# Altium PCB SmartGarden.PcbDoc
Units mil, origin at the board's own origin, x right, y up, seen from the top; angles counter-clockwise.
Board outline 10512 x 650 mil, 2 copper layers (Top Layer, Bottom Layer); 29 components, 29 nets, 221 pads, 24 vias.
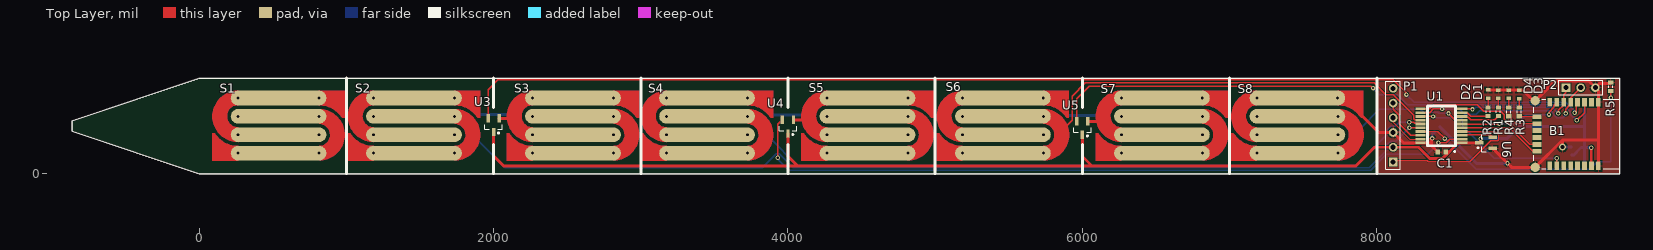
[diagram p0: Top Layer view]
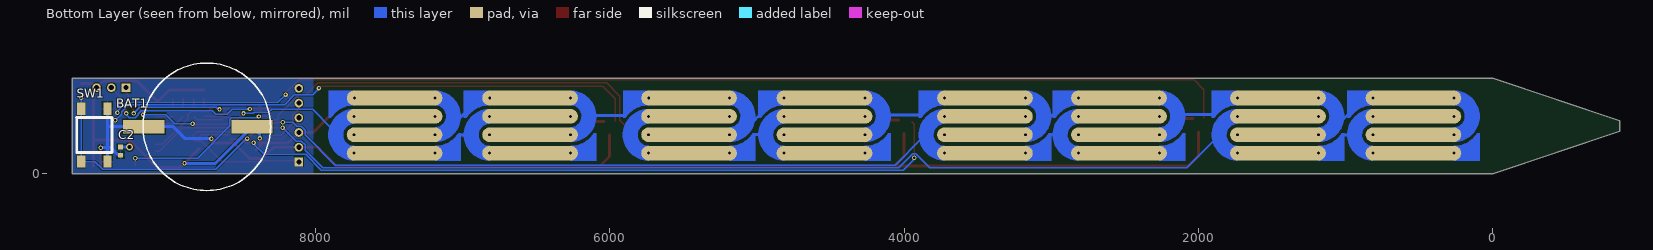
[diagram p1: Bottom Layer view, seen from below]

## Layer stack, top to bottom
Top Solder: solder mask 0.4, Solder Resist, Dk 3.5
Top Layer: signal copper 1.4
Dielectric 1: dielectric 12.6, FR-4, Dk 4.8
Bottom Layer: signal copper 1.4
Bottom Solder: solder mask 0.4, Solder Resist, Dk 3.5

## Board outline
9650,0 0,0 -862,290 -862,360 0,650 9650,650

## Design rules (kind name [scope] priority, off if disabled: settings)
Clearance [All] p1: gap=7
HoleSize [All] p1: absolutevalues=TRUE maxlimit=100 minlimit=10 maxpercent=80.000 minpercent=20.000
MinimumSolderMaskSliver [All] p1: minsoldermaskwidth=7
PolygonConnect [All] p1: connectstyle=Relief reliefconductorwidth=10 reliefentries=4 polygonreliefangle="90 Angle" airgapwidth=10
RoutingVias [All] p1: holewidth=15 width=30 viastyle="Through Hole" minholewidth=10 minwidth=25 maxholewidth=28 maxwidth=50
SilkToSilkClearance [All] p1 off: silktosilkclearance=10
SilkToSolderMaskClearance [IsPad] p1 off: minsilkscreentomaskgap=10 clearancetoexposedcopper=TRUE
SolderMaskExpansion [All] p1: expansion=4
Width Width_VCC [InNet('VCC')] p1: maxlimit=20 minlimit=8 preferedwidth=20
Width Width_GND [InNet('GND')] p2: maxlimit=20 minlimit=8 preferedwidth=20 minimp=50.000000 maximp=50.000000 favimp=50.000000
Width [All] p3: maxlimit=20 minlimit=8 preferedwidth=20 minimp=50.000000 maximp=50.000000 favimp=50.000000
26 further rules are at their usual default settings.

## Components (designator, comment, footprint, x,y, rotation, side; value= is the part's Value field where it differs from the comment)
B1 "RN4020" "RN4020 MODULE-24" 9290,270 r270 top
BAT1 "2032 Coin Cell" 1063TR-COINCELL 8770,320 r270 bottom
C1 "Cap Semi" 1608[0603] 8441,148 r0 top
C2 "Cap Semi" 1608[0603] 9322,154 r270 bottom
D1 "LED" 603_ 8825,540 r0 top
D2 "LED" 603_ 8756,541 r0 top
D3 "LED" 603_ 8966,539 r0 top
D4 "LED" 603_ 8895,540 r0 top
P1 "Header 6" HDR1X6 8110,80 r90 top
P2 "Serial" HDR1X3 9284,585 r0 top
R1 "Res3" J1-0603 8825,421 r90 top
R2 "Res3" J1-0603 8755,421 r90 top
R3 "Res3" J1-0603 8967,420 r90 top
R4 "Res3" J1-0603 8895,420 r90 top
R5 "Res3" J1-0603 9588,591 r270 top
S1 "MoistureSensor" MOISTURE_2 90,90 r0 top
S2 "MoistureSensor" MOISTURE_2 1010,90 r0 top
S3 "MoistureSensor" MOISTURE_2 2090,90 r0 top
S4 "MoistureSensor" MOISTURE_2 3000.19,90 r0 top
S5 "MoistureSensor" MOISTURE_2 4090,90 r0 top
S6 "MoistureSensor" MOISTURE_2 5010,90 r0 top
S7 "MoistureSensor" MOISTURE_2 6090,90 r0 top
S8 "MoistureSensor" MOISTURE_2 7010,90 r0 top
SW1 "PUSHBUTTON" PUSHBUTTON 9411,83 r0 bottom
U1 "PIC16LF1559" SSOP-20 8580,210 r180 top
U3 "MCP9700" SOT23_M 2000,330 r270 top
U4 "MCP9700" SOT23_M 4000,320 r270 top
U5 "MCP9700" SOT23_M 6000,310 r270 top
U6 "MCP9700" SOT23_M 8740,210 r180 top

## Footprints (in the part's own frame and the unit in brackets; to place one, negate y for a bottom-side part, rotate by r counter-clockwise, add the part's x,y. Pads: shape width x height; smd on the part's side, far side on the other; paste and mask are expansions set on the pad)
603_ [mm]
  rect 0.8x0.6 smd: 1(0,-0.725) 2(0,0.725)
1063TR-COINCELL [mm]
  rect 2.36x7.1 smd: 1(0,-10) 2(0,8.7)
  silkscreen extent -10.97,-10.12 11.02,11.87
1608[0603] [mm] "Chip Capacitor, Body 1.6x0.8mm, IPC High Density"
  rect 0.8x0.9 smd: 1(-0.7,0) 2(0.7,0)
  body extent -0.87,-0.48 0.87,0.48, height 1.3
HDR1X3 [mm] "Connector; Header; 3 Position"
  rect 1.5x1.5 hole 0.9: 1(0,0)
  round 1.5 hole 0.9: 2(2.54,0) 3(5.08,0)
  silkscreen extent -1.27,-1.27 6.35,1.27
HDR1X6 [mm] "Connector; Header; 6 Position"
  rect 1.5x1.5 hole 0.9: 1(0,0)
  round 1.5 hole 0.9: 2(2.54,0) 3(5.08,0) 4(7.62,0) 5(10.16,0) 6(12.7,0)
  silkscreen extent -1.27,-1.27 13.97,1.27
J1-0603 [mm] "Chip Resistor, Body 1.6x0.8mm, IPC High Density"
  rect 0.7x0.9 smd: 1(-0.75,0) 2(0.75,0)
  silkscreen extent -0.2,-0.35 0.2,0.35, body extent -0.85,-0.48 0.85,0.48, height 0.9
MOISTURE_2 [mil]
  round 30 hole 20: 0(175,175.13) 0(175.01,425.36) 0(723.64,424.77) 0(725,175) 1(175,300) 1(175,49.88) 1(725,49.64) 1(725,299.87)
  oval 650x100 smd paste-1000: 0(449.93,424.51) 0(450,175) 1(450,50) 1(450,300)
  oval 650x100 smd far side paste-1000: 0(449.93,424.51) 0(450,175) 1(450,50) 1(450,300)
  Top Layer region: 723.64,374.66 809.98,354.39 876.55,295.78 876.56,295.78 882.97,290.02 898.64,290.02 898.64,299.66 898.64,474.66 723.64,474.66
  Top Layer region: 175,125.25 87.95,149.33 24.08,213.2 0,300.25 0,300.25 24.08,387.3 87.95,451.17 175,475.25 175,475.25 175,375.25 146.05,369.98 121.49,353.76 105.27,329.21 100,300.25 100,300.25 110.54,263.1 137.85,235.79 175,225.25 175,225.25
  Top Layer region: 725,349.75 812.05,325.67 875.92,261.8 900,174.75 900,174.75 875.92,87.7 812.05,23.83 725,-0.25 725,-0.25 725,99.75 753.95,105.02 778.51,121.24 794.73,145.79 800,174.75 800,174.75 789.46,211.9 762.15,239.21 725,249.75 725,249.75
  Top Layer region: 175,100 91.86,118.66 26.27,173.04 26.27,173.04 15.67,184.64 0,184.64 0,175 0,0 175,0
  Bottom Layer region: 723.64,374.66 809.98,354.39 876.56,295.78 876.56,295.78 882.97,290.02 898.64,290.02 898.64,299.66 898.64,474.66 723.64,474.66
  Bottom Layer region: 175,125.25 87.95,149.33 24.08,213.2 0,300.25 0,300.25 24.08,387.3 87.95,451.17 175,475.25 175,475.25 175,375.25 146.05,369.98 121.49,353.76 105.27,329.21 100,300.25 100,300.25 110.54,263.1 137.85,235.79 175,225.25 175,225.25
  Bottom Layer region: 725,349.75 812.05,325.67 875.92,261.8 900,174.75 900,174.75 875.92,87.7 812.05,23.83 725,-0.25 725,-0.25 725,99.75 753.95,105.02 778.51,121.24 794.73,145.79 800,174.75 800,174.75 789.46,211.9 762.15,239.21 725,249.75 725,249.75
  Bottom Layer region: 175,100 91.86,118.66 26.27,173.04 26.27,173.04 15.67,184.64 0,184.64 0,175 0,0 175,0
PUSHBUTTON [mm] "TE 5-1437565-0"
  rect 1.4x2.1 smd: 1(4.5,-9.1) 1(4.5,0) 2(0,-9.1) 2(0,0)
  silkscreen extent -0.8,-7.57 5.3,-1.55
"RN4020 MODULE-24" [mm]
  rect 1.5x0.8 smd: 1(-5.5,5.45) 2(-5.5,4.25) 3(-5.5,3.05) 4(-5.5,1.85) 5(-5.5,0.65) 6(-5.5,-0.55) 7(-5.5,-1.75) 8(-5.5,-2.95) 17(5.5,-2.95) 18(5.5,-1.75) 19(5.5,-0.55) 20(5.5,0.65) 21(5.5,1.85) 22(5.5,3.05) 23(5.5,4.25) 24(5.5,5.45)
  round 1.6 smd: 9(-5.75,-5.45) 16(5.75,-5.45)
  rect 0.8x1.5 smd: 10(-3,-5.15) 11(-1.8,-5.15) 12(-0.6,-5.15) 13(0.6,-5.15) 14(1.8,-5.15) 15(3,-5.15)
  silkscreen extent -6,-5.75 6,9.1, body extent -5.75,-5.45 5.75,14.05, height 2.3
SOT23_M [mm] "SOT23, 3-Leads, Body 2.9x1.3mm, Pitch 0.95mm, Lead Span 2.3mm - Reverse Pinning, IPC Low Density"
  rect 1.45x0.6 smd: 1(1.175,0) 2(-1.175,-0.95) 3(-1.175,0.95)
  silkscreen extent -0.1,-1.5 1.47,1.5, body extent -0.7,-1.5 0.7,1.5, height 1.1
SSOP-20 [mm]
  rect 1.75x0.45 smd: 1(0,0) 2(0,-0.65) 3(0,-1.3) 4(0,-1.95) 5(0,-2.6) 6(0,-3.25) 7(0,-3.9) 8(0,-4.55) 9(0,-5.2) 10(0,-5.85) 11(7.2,-5.85) 12(7.2,-5.2) 13(7.2,-4.55) 14(7.2,-3.9) 15(7.2,-3.25) 16(7.2,-2.6) 17(7.2,-1.95) 18(7.2,-1.3) 19(7.2,-0.65) 20(7.2,0)
  silkscreen extent 1.2,-6.35 5.98,1.63

## Part data
C1 C2: "Capacitor (Semiconductor SIM Model)"
P1: "Header, 6-Pin"
P2: library part "Header 3", "Header, 3-Pin"
R1 R2 R3 R4 R5: "Resistor"
SW1: "TE 5-1437565-0"

## Via types
v1: diameter 30, hole 15, Top Layer to Bottom Layer, 23 vias
v2: diameter 50, hole 28, Top Layer to Bottom Layer, 1 vias

## Nets (pads, with @x,y where several pads share a name; then routed paths per layer and width w, separated by ;. In a path a pad name is that pad's centre, name@x,y a point inside that pad or via, vN(x,y) a via of type N, cw(c..) or ccw(c..) an arc to the next point about the centre after c; other vN are vias at no path point)
CONNECT: B1.10 R3.1 | length 121.2
  Top Layer w10: R3.1 8969.36,388.11 B1.10
CTS: B1.14 U1.11 | length 929.9
  Top Layer w10: U1.11 8360.27,440.31 8387.96,468 8682,468 8725.25,424.75 8840.19,424.75 8865.28,399.66 8865.28,371.72 9037.87,199.13 B1.14
GND: B1.1 B1.9 B1.16 B1.24 BAT1.2 C1.1 C2.1 D1.2 D2.2 D3.2 D4.2 P1.3 P2.3 R5.1 S1.0 S2.0 S3.0 S4.0 S5.0 S6.0 S7.0 S8.0 U1.20 U3.3 U4.3 U5.3 U6.3 | length 4988.9
  Top Layer w20: U3.3 2123.26,376.26 ; U4.3 4105.26,366.26 ; U5.3 6113.74,356.26 ; 7872,421 8013,280 P1.3 8180,210 ; 8180,209 8370,209 ; v1@8367,239 8367,219 8370,222 8370,190.44 C1.1@8400.44,160 ; v1@8376,238 v1(8376,240) ; D2.2 8990.46,569.54 9063.62,496.38 B1.9 9210.58,631.53 9437.47,631.53 P2.3 ; U6.3 v1@8887.43,71.43 ; v1(8887,71) v1@8887.43,71.43 ; v2(9260.44,181.56) 9260.44,228.63 ; B1.24 9506,54.9 9506,563 P2.3 ; 9506,230 9261.81,230 9260.44,228.63 ; R5.1@9589,614.53 9513.53,614.53 P2.3 ; v1@8887.43,71.43 8915.23,43.62 B1.16 9260.44,228.63
  Bottom Layer w20: 978,410 1048,340 1048,337 ; 1898,402 2111,402 ; 2979,395 3033,395 ; 3885,400 4116,400 4117,401 ; 4974,405 5037,342 5038,342 ; 5900,396 6111,396 ; 6972,424 7028,368 7052,368 ; v1(8376,240) 8376,268.52 BAT1.2@8393,285.52 ; BAT1.2 8676.48,71 v1(8887,71) ; v2(9260.44,181.56) C2.1
LED1: R1.1 U1.8 | length 268.2
  Top Layer w10: U1.8 8580,384.4 8619.42,384.4 8638.13,365.69 8799.22,365.69 R1.1
LED2: R2.1 U1.9 | length 184.6
  Top Layer w10: U1.9 8614.68,414.72 8637.94,391.47 R2.1
M1: S1.1 S2.1 U1.16 | length 6748.6
  Top Layer w10: v1(8220.36,312.36) U1.16
  Bottom Layer w10: 1894,226 2080,40 3823.82,40 3919.82,136 3942.18,136 4037.18,41 7949,41 8068.47,160.47 8068.47,197.2 8092.8,221.53 8129.53,221.53 v1(8220.36,312.36)
  Bottom Layer w20: 966,263 1022,263
M2: S3.1 S4.1 U1.15 | length 4671.6
  Top Layer w10: v1(8219,350) 8249.8,350 8257.12,342.68 8291.8,342.68 U1.15
  Bottom Layer w10: 3878,240 4059,59 7862,59 8068.47,265.47 8068.47,297.2 8092.8,321.53 8124.53,321.53 8153,350 v1(8219,350)
  Bottom Layer w20: 2976,265 3010,265
M3: S5.1 S6.1 U1.14 | length 2776.6
  Top Layer w10: 5896.88,330.55 5931,364.67 5931,528 6020,617 7981,617 8061,537 8111.73,537 8250.09,398.64 8250.09,375.3 8257.12,368.27 8291.8,368.27 U1.14
  Bottom Layer w20: 4975,267 5019,267
M4: S7.1 S8.1 U1.7 | length 901.9
  Top Layer w10: v1(8486,410) 8532.46,363.54 U1.7
  Bottom Layer w10: 7889,236 7889,310 8017,438 8295.27,438 8317.13,416.13 8413.87,416.13 8420,410 v1(8486,410)
  Bottom Layer w20: 6967,264 7020,264
MLDP: B1.8
MLDP_EV: B1.11 R4.1 | length 212.8
  Top Layer w10: R4.1 8944.61,340.87 B1.11
NetD1_1: D1.1 R1.2 | length 60.9
  Top Layer w10: R1.2 D1.1
NetD2_1: D2.1 R2.2 | length 60.9
  Top Layer w10: R2.2 D2.1@8755,511.46
NetD3_1: D3.1 R3.2 | length 59.9
  Top Layer w10: R3.2 D3.1@8967,509.46
NetD4_1: D4.1 R4.2 | length 61.9
  Top Layer w10: R4.2 D4.1
NetP1_1: P1.1 U1.4 | length 1074.7
  Top Layer w10: P1.1 8120,90 8341.89,90 8348.89,83 8631.1,83 8771.69,223.59 8819.77,223.59 8826.8,230.62 8826.8,264.18 8804.21,286.77 U1.4
NetP1_4: P1.4 U1.19 | length 264.5
  Top Layer w8: P1.4 8110,349 8223.41,235.59 U1.19
NetP1_5: P1.5 U1.18 | length 335.8
  Top Layer w10: P1.5 8110,438.73 8151.53,397.2 8151.53,338.47 8228.82,261.18 U1.18
NetR5_2: R5.2 SW1.1 U1.17 | length 1876.1
  Top Layer w10: U1.17 8414.23,286.77 8461,240 v1(8461,239) ; v1(9589,516) R5.2@9589,555.47
  Bottom Layer w10: v1(8461,239) 8461,244 8675.34,29.66 9443.53,29.66 9496.87,83 9588.17,83 SW1.1@9588.17,417.84 ; SW1.1@9589,442.1 v1(9589,516)
RTS: B1.18 U1.13 | length 1121.8
  Top Layer w10: U1.13 v1(8381.87,389.13) ; B1.18 v1(9221.1,105.9)
  Bottom Layer w10: v1(8381.87,389.13) 8390,381 8569.67,381 8579.25,371.43 8579.25,324.57 8797.92,105.9 v1(9221.1,105.9)
RX: B1.6 P2.1 U1.10 | length 856.2
  Top Layer w10: U1.10 8645.69,440.31 v1(8649,437) ; v1(9232,410) 9232,430 B1.6@9268.35,466.35 ; B1.6@9268,476.88 9266,478.88 9271,483.88 B1.6 9268.35,535.35 9284,551 P2.1
  Bottom Layer w10: v1@8659,437 8673,451 9191,451 v1(9232,410)
TEMP1: B1.4 U3.2 | length 7786.1
  Top Layer w10: U3.2 1962.6,569.6 2030,637 8111.73,637 8200,548.73 v1(8200,538) ; v1(9343,415) 9354,426 9354,477.7 B1.4
  Bottom Layer w10: v1(8200,538) 8253,485 9284,485 9343,426 v1(9343,415)
TEMP2: U1.2 U4.2 | length 5036.8
  Top Layer w10: v1(3931,109) 3931,334.66 3949,352.66 ; v1(8418,211) 8471.18,211 8495.77,235.59 U1.2
  Bottom Layer w10: v1(3931,109) 3931,99 4006,24 7957,24 8065,132 8347,132 8422,207 v1(8418,211)
TEMP3: B1.3 U5.2 | length 3843.8
  Top Layer w10: U5.2 5962.6,509.6 6046,593 7958,593 7969,582 v1(7974,582) ; v1@9358,373 v1(9358,364) 9410.08,416.08 B1.3
  Bottom Layer w10: v1(7974,582) 7974,577 8016,535 8140,535 8207,468 9268.18,468 9314,422.18 9314,405.82 9355.82,364 v1(9358,364)
TEMP4: U1.3 U6.2 | length 215.1
  Top Layer w10: U1.3 8583.82,265 8768.66,265 U6.2
TX: B1.5 P2.2 U1.12 | length 1286.9
  Top Layer w10: U1.12 8358.72,414.72 8384,440 v1(8443,440) ; v1(9283,410) 9283,438.94 9296.1,452.04 9296.1,455.04 9320,478.94 9314,484.94 B1.5 9315.59,516.59 P2.2
  Bottom Layer w10: v1(8443,440) 8446,437 8564,437 8597,404 8674,404 8699,429 9181,429 9201,409 9201,399.82 9220.82,380 9262,380 v1@9289,407
VCC: B1.23 BAT1.1 C1.2 C2.2 P1.2 SW1.2 U1.1 U3.1 U4.1 U5.1 U6.1 | length 8899.1
  Top Layer w20: U3.1 2000,122 2069,53 4066,53 ; U4.1 4000,119 4066,53 ; U5.1 6000,118 6065,53 ; 8635.73,208.73 8550.73,208.73 8447,105 8358,105 8283,180 P1.2 7984,180 7857,53 6065,53 ; 8644,210 U6.1 8704,220.26 v1(8704,238) ; B1.23@9456,54.79 9459,57.79 9456,60.79 v1(9456,177) ; 4066,53 6065,53
  Bottom Layer w20: v1(8704,238) 8882,238 8964,320 BAT1.1 9409,320 9410,319 ; C2.2 9335.44,126.44 9387,178 9411,178 ; SW1.2@9411,83 9411,178 ; SW1.2@9411,441.27 9411,178 ; v1@9456,178 9411,178
WAKE_HW: B1.15 U1.5 | length 573.7
  Top Layer w10: U1.5 8899.64,312.36 9060.11,151.89 B1.15
WAKE_SW: B1.7 U1.6 | length 724.1
  Top Layer w10: U1.6 8829.95,337.95 v1(8832,340) ; v1(9169,402) 9169,419.43 9201.61,452.04 9201.61,461.04 9223,482.43 9220,485.43 B1.7
  Bottom Layer w10: v1(8832,340) 8952.89,340 9014.89,402 v1(9169,402)
pads on no net: B1.2 B1.12 B1.13 B1.17 B1.19 B1.20 B1.21 B1.22 P1.6

## Polygon pours and split planes (outlines as drawn)
GND on Top Layer "Multi-Layer-No Net" (solid, pour order 4): 8010,650 8010,0 9645,0 9645,650
VCC on Bottom Layer "Multi-Layer-No Net" (solid, pour order 3): 8012,650 8012,0 9647,0 9647,650

## Silkscreen, mask and mechanical layers (free items; w line width, h text height)
Top Overlay:
  lines w1: -862,290 -862,360 0,650 9650,650 9650,0 0,0 -862,290
  lines w20: 1000,0 1000,650 ; 2000,0 2000,200 ; 2000,450 2000,650 ; 3000.19,0 3000.19,650 ; 4000,0 4000,200 ; 4000,450 4000,650 ; 5000,0 5000,650 ; 6000,0 6000,200 ; 6000,450 6000,650 ; 7000,0 7000,650 ; 8000,0 8000,650